# Altium PCB PCB1.PcbDoc (part 2 of 2)
Units mil, origin at the board's own origin, x right, y up, seen from the top; angles counter-clockwise.
Board outline 2700 x 1000 mil, 4 copper layers (L1, L2, L3, L4), stack 61.583 mil thick; 64 components, 73 nets, 299 pads, 54 vias.
Unrouted connection lines stored in the file: 173.
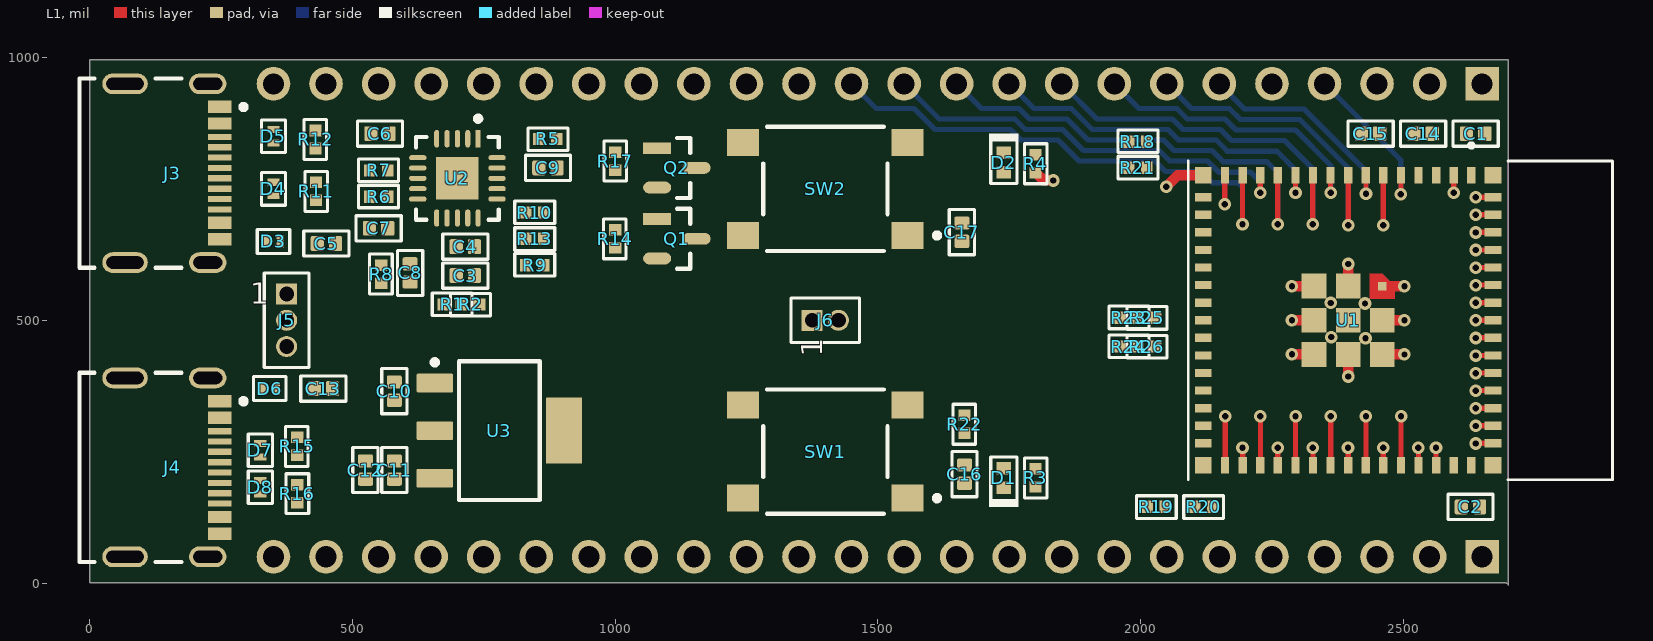
[diagram p0: L1 view]

## Part data (continued)
U3: "IC REG LIN 3.3V 1.5A SOT-223-4", Case/Package=SOT-223, Dropout Voltage=340mV, Input Bias Current=1mA, LCSC Part Number=C181262, Manufacturer="Texas Instruments", Manufacturer Lifecycle Status=ACTIVE, Max Operating Temperature=125°C, Max Output current=1.5A, Max Output Voltage=3.3V, Max Supply Voltage=20V, Min Current Limit=1.6A, Min Input Voltage=2.1V, Min Operating Temperature=-40°C, Supplier Part Number=296-24897-1-ND, Accuracy=3%, Category="LDO Voltage Regulators", ComponentLink1Description=https://datasheet.octopart.com:443/TL1963A-33DCYR-Texas-Instruments-datasheet-36835243.pdf?src-supplier=Texas+Instruments, ComponentLink1URL=https://datasheet.octopart.com:443/TL1963A-33DCYR-Texas-Instruments-datasheet-36835243.pdf?src-supplier=Texas+Instruments, ComponentLink2Description=https://octopart.com:443/opatz8j6/c1?t=3JsRIWqSL6w1YMJXUK4XflAjsV25ZZ_EetkhRYSAm2EBbnI7xXtyeG2xBdi87VpruzSQslnPG3MlCeq04Zf6_Wn-gbt73EcFwwS4SfZRo1SYsoWdJbtdm2yz9kLnOQiP5JpaTudvqM-9h63LWMv9fbu-og1U5PIleNPWEf7-bIKhh7h75kq7odK3UdIZw25Kv9-AILfUWP6PQjSZg4OQIrevZq1IFwdRPfSsN3Yxj7nPY41BQPnmV5rw9N0yaKfQo33QNfAFF_mFd2Zevg4OY0rB-bDb5_TwGj-Ur9LA0wBxWL8nhy2C-wQ2Sm4Cmp_5hpFAOTw7MI9oJy4UgUW1uRs8koqvsNYcHWrtBkSknF1nQXive0-rPctF-STb1cB_CFh3Xas&src-supplier=Texas+Instruments, ComponentLink2URL=https://octopart.com:443/opatz8j6/c1?t=3JsRIWqSL6w1YMJXUK4XflAjsV25ZZ_EetkhRYSAm2EBbnI7xXtyeG2xBdi87VpruzSQslnPG3MlCeq04Zf6_Wn-gbt73EcFwwS4SfZRo1SYsoWdJbtdm2yz9kLnOQiP5JpaTudvqM-9h63LWMv9fbu-og1U5PIleNPWEf7-bIKhh7h75kq7odK3UdIZw25Kv9-AILfUWP6PQjSZg4OQIrevZq1IFwdRPfSsN3Yxj7nPY41BQPnmV5rw9N0yaKfQo33QNfAFF_mFd2Zevg4OY0rB-bDb5_TwGj-Ur9LA0wBxWL8nhy2C-wQ2Sm4Cmp_5hpFAOTw7MI9oJy4UgUW1uRs8koqvsNYcHWrtBkSknF1nQXive0-rPctF-STb1cB_CFh3Xas&src-supplier=Texas+Instruments, ComponentLink3Description=https://datasheet.octopart.com:443/TL1963A-33DCYR-Texas-Instruments-datasheet-10255270.pdf?src-supplier=Texas+Instruments, ComponentLink3URL=https://datasheet.octopart.com:443/TL1963A-33DCYR-Texas-Instruments-datasheet-10255270.pdf?src-supplier=Texas+Instruments, ComponentLink4Description=https://sigma.octopart.com:443/49253063/technical_drawing/Texas-Instruments-TL1963A-33DCYR.pdf?src-supplier=Texas+Instruments, ComponentLink4URL=https://sigma.octopart.com:443/49253063/technical_drawing/Texas-Instruments-TL1963A-33DCYR.pdf?src-supplier=Texas+Instruments, ComponentLink5Description=https://datasheet.octopart.com:443/TL1963A-33DCYR-Texas-Instruments-datasheet-159117591.pdf?src-supplier=Augswan, ComponentLink5URL=https://datasheet.octopart.com:443/TL1963A-33DCYR-Texas-Instruments-datasheet-159117591.pdf?src-supplier=Augswan, ComponentLink6Description=https://datasheet.octopart.com:443/TL1963A-33DCYR-Texas-Instruments-datasheet-21820479.pdf?src-supplier=Newark, ComponentLink6URL=https://datasheet.octopart.com:443/TL1963A-33DCYR-Texas-Instruments-datasheet-21820479.pdf?src-supplier=Newark, ComponentLink7Description=https://datasheet.octopart.com:443/TL1963A-33DCYR-Texas-Instruments-datasheet-16079880.pdf?src-supplier=Farnell, ComponentLink7URL=https://datasheet.octopart.com:443/TL1963A-33DCYR-Texas-Instruments-datasheet-16079880.pdf?src-supplier=Farnell, ComponentLink8Description=https://datasheet.octopart.com:443/TL1963A-33DCYR-Texas-Instruments-datasheet-14171511.pdf?src-supplier=iiiC, ComponentLink8URL=https://datasheet.octopart.com:443/TL1963A-33DCYR-Texas-Instruments-datasheet-14171511.pdf?src-supplier=iiiC, ComponentLink9Description=http://sigma.octopart.com:80/reach_statement/Texas-Instruments-company-64.pdf?src-supplier=Compliance+Statements, ComponentLink9URL=http://sigma.octopart.com:80/reach_statement/Texas-Instruments-company-64.pdf?src-supplier=Compliance+Statements, ComponentLink10Description=http://sigma.octopart.com:80/conflict_mineral_statement/Texas-Instruments-company-63.pdf?src-supplier=Compliance+Statements, ComponentLink10URL=http://sigma.octopart.com:80/conflict_mineral_statement/Texas-Instruments-company-63.pdf?src-supplier=Compliance+Statements, Contact Plating=Tin, Height=1.8mm, Lead Free="Lead Free", Length=6.5mm, Lifecycle Status=Production, Manufacturer Part Number=TL1963A-33DCYR, Min Output Voltage=3.3V, Nominal Output Voltage=3.3V, Number of Outputs=1, Number of Regulators=1, Output Current=1.5A, Output Type=Fixed, Output Voltage=3.3V, Pins=4, Polarity=Positive, Pricing="1=2.76, 10=2.06, 25=1.8848, 100=1.6922, 250=1.60032, 500=1.54492, 1000=1.49932 (USD)", Quiescent Current=1mA, Radiation Hardening=No, REACH SVHC=No, RoHS=Compliant, Schedule B="8542390000, 8542390000|8542390000|8542390000|8542390000|8542390000", Stock=5348, Supplier=DigiKey, Thickness=1.6mm, Width=3.5mm

## Via types
v1: diameter 24, hole 12, L1 to L4, 54 vias

## Nets (pads, with @x,y where several pads share a name; then routed paths per layer and width w, separated by ;. In a path a pad name is that pad's centre, name@x,y a point inside that pad or via, vN(x,y) a via of type N, cw(c..) or ccw(c..) an arc to the next point about the centre after c; other vN are vias at no path point)
+3V3: C1.2 C2.2 C14.2 C15.2 J1.2 J2.1 J6.2 R2.1 R3.2 R4.2 R5.1 R22.2 U1.3 | length 40.1
  L1 w20: R4.2 1800.79,780.75 1815.54,766 v1(1834,766)
+3V3_FTDI: C7.2 C9.2 R5.2 R8.1 U2.10 U2.20
+3V3_REG: C11.2 C12.2 J6.1 U3.3
+5V: C6.2 C10.2 J1.22 J5.2 R1.1 U3.1
+5V_VBUS1: C5.2 D3.2 J3.A4B9 J3.B4A9 J5.1 R10.2
+5V_VBUS2: C13.2 D6.2 J4.A4B9 J4.B4A9 J5.3
+VCC_FTDI: C3.2 C4.2 R1.2 R2.2 U2.12
BTN_GPIO0: C17.2 Q2.3 R21.1 SW2.1 SW2.2
CHIP_PU: C16.2 J2.3 Q1.3 R22.1 SW1.1 SW1.2 U1.45
CON1_USB_N: D4.2 J3.A7 J3.B7 R6.1
CON1_USB_P: D5.2 J3.A6 J3.B6 R7.1
CON2_USB_N: D7.2 J4.A7 J4.B7 R23.1
CON2_USB_P: D8.2 J4.A6 J4.B6 R24.1
CON_ESP_USB_N: J2.21 R25.1
CON_ESP_USB_P: J2.20 R26.1
CON_GPIO0: J1.3 R18.1
DTR_FTDI: Q2.2 R14.2 U2.18
ESP_USB_N: R23.2 R25.2 U1.23
ESP_USB_P: R24.2 R26.2 U1.24
FTDI_USB_N: R6.2 U2.9
FTDI_USB_P: R7.2 U2.8
GND: C1.1 C2.1 C3.1 C4.1 C5.1 C6.1 C7.1 C8.1 C9.1 C10.1 C11.1 C12.1 C13.1 C14.1 C15.1 C16.1 C17.1 D1.1 D3.1 D4.1 D5.1 D6.1 D7.1 D8.1 J1.1 J1.23 J2.2 J2.24 J3.A1B12 J3.B1A12 J3.S1 J3.S2 J3.S3 J3.S4 J4.A1B12 J4.B1A12 J4.S1 J4.S2 J4.S3 J4.S4 R9.2 R11.1 R12.1 R13.1 R15.1 R16.1 SW1.3 SW1.4 SW2.3 SW2.4 U1.1 U1.2 U1.42 U1.43 U1.46 U1.47 U1.48 U1.49 U1.50 U1.51 U1.52 U1.53 U1.54 U1.55 U1.56 U1.57 U1.58 U1.59 U1.60 U1.61 U1.62 U1.63 U1.64 U1.65 U1.66 U1.67 U1.68 U1.69 U1.70 U1.71 U1.72 U1.73 U2.3 U2.13 U2.21 U3.2 U3.4 | length 1001.3
  L1 w10: U1.42 v1@2528.9,256.94 ; U1.43 v1@2562.36,256.94 ; v1@2595.83,743.06 U1.2 ; v1@2638.1,265.75 U1.46 ; v1@2638.1,299.21 U1.47 ; v1@2638.1,332.68 U1.48 ; v1@2638.1,366.14 U1.49 ; v1@2638.1,399.61 U1.50 ; v1@2638.1,433.07 U1.51 ; v1@2638.1,466.54 U1.52 ; v1@2638.1,500 U1.53 ; v1@2638.1,533.46 U1.54 ; v1@2638.1,566.93 U1.55 ; v1@2638.1,600.39 U1.56 ; v1@2638.1,633.86 U1.57 ; v1@2638.1,667.32 U1.58 ; v1@2638.1,700.79 U1.59 ; v1@2638.1,734.25 U1.60
  L1 w20: v1(2049,754) 2070.59,775.59 U1.63 ; v1(2288,565) v1(2288,565) U1.71 ; v1@2288.04,435.04 U1.73 ; v1(2288,500.04) U1.72 ; v1(2395,392.96) U1.70 ; U1.69 v1@2395.04,607 ; U1.68 v1@2502.04,435.04 ; U1.67 v1@2502.04,500 ; U1.66 v1@2502.04,564.96
  other v1: 2528.65,257.19 2562.11,257.19 2637.85,265.5 2637.85,298.96 2637.85,332.43 2637.85,365.89 2637.85,399.36 2637.85,432.82 2288,435.08 2502.08,435 2428,466 2637.85,466.29 2363,468 2502.08,499.96 2637.85,499.75 2427,532 2362,533 2637.85,533.22 2502.08,564.92 2637.85,566.68 2637.85,600.15 2395.08,607.04 2637.85,633.61 2637.85,667.07 2637.85,700.54 2637.85,734 2596.07,742.81
GPIO0: R18.2 R21.2 U1.4
GPIO1: J1.4 U1.5 | length 305.8
  L1 w10: v1(2495,740) 2495.43,740.43 U1.5
  L4 w10: J1.4 2495,805 v1(2495,740)
GPIO2: D2.1 J1.5 U1.6 | length 94.6
  L1 w10: v1@2461.97,681.04 U1.6
  other v1: 2461.95,681.02
GPIO3: J1.6 U1.7 | length 424
  L1 w10: v1(2429,741) 2428.75,741.25 2428.75,773.78 U1.7@2429,774.02
  L4 w10: J1.6 2198,902 2311,902 2429,784 v1(2429,741)
GPIO4: J1.7 U1.8 | length 614.7
  L1 w10: v1(2395,681) U1.8
  L4 w10: J1.7 2097,903 2168.72,903 2189.86,881.86 2302.86,881.86 2395.04,789.68 v1(2395,681) v1(2395,681)
GPIO5: J1.8 U1.9 | length 560.5
  L1 w10: v1@2361.57,743.06 U1.9
  L4 w10: J1.8 1997,903 2068.72,903 2088.72,883 2160.43,883 2181.57,861.86 2294.57,861.86 2361.82,794.61 v1(2361.82,742.81)
GPIO6: J1.9 U1.10 | length 744.8
  L1 w10: v1(2327.82,682.81) U1.10@2327.84,777.39
  L4 w10: J1.9 1917,883 2060.43,883 2080.43,863 2152.15,863 2173.29,841.86 2274.14,841.86 2327.82,788.18 v1(2327.82,682.81)
GPIO7: J1.10 U1.11 | length 688.6
  L1 w10: v1@2294.65,743.06 U1.11
  L4 w10: J1.10 1797,903 1868,903 1908,863 2052.15,863 2072.15,843 2143.86,843 2165.01,821.86 2259.14,821.86 2294.89,786.11 v1(2294.89,742.81)
GPIO8: J1.11 U1.12 | length 873.7
  L1 w10: v1(2260.89,682.81) U1.12@2260.91,777.39
  L4 w10: J1.11 1697,903 1768.72,903 1788.72,883 1859.72,883 1899.72,843 2043.86,843 2063.86,823 2135.58,823 2156.72,801.86 2240.18,801.86 2260.89,781.14 v1(2260.89,682.81)
GPIO9: J1.12 U1.13 | length 808.3
  L1 w10: v1@2227.72,743.06 U1.13
  L4 w10: J1.12 1617,883 1760.43,883 1780.43,863 1851.43,863 1891.43,823 2035.58,823 2055.58,803 2127.29,803 2148.44,781.86 2209.28,781.86 2228,763.14 2228,742.85 v1(2227.96,742.81)
GPIO10: J1.13 U1.14 | length 990.4
  L1 w10: v1(2193.96,682.81) U1.14@2193.98,777.39
  L4 w10: J1.13 1497,903 1568.72,903 1608.72,863 1752.15,863 1772.15,843 1843.15,843 1883.15,803 2027.29,803 2047.29,783 2115,783 2136.14,761.86 2185.29,761.86 2193.96,753.18 v1(2193.96,682.81)
GPIO11: J1.14 U1.15 | length 54.9
  L1 w10: v1(2160,721) 2160.39,721.39 2160.39,775.2 U1.15
GPIO12: J1.15 U1.16
GPIO13: J1.16 U1.17
GPIO14: J1.17 U1.18
GPIO15: J1.18 U1.19
GPIO16: J1.19 U1.20
GPIO17: J1.20 U1.21
GPIO18: J1.21 U1.22
GPIO21: J2.19 U1.25
GPIO26: J2.18 U1.26
GPIO33: J2.17 U1.28
GPIO34: J2.16 U1.29
GPIO35: J2.15 U1.31 | length 94.6
  L1 w10: U1.31@2161.06,222.61 v1(2161.07,317.19)
GPIO36: J2.14 U1.32 | length 32.5
  L1 w10: U1.32 v1@2194.25,256.94
  other v1: 2194,257.19
GPIO37: J2.13 U1.33 | length 94.6
  L1 w10: U1.33@2227.98,222.61 v1(2228,317.19)
GPIO38: J2.12 U1.34 | length 32.5
  L1 w10: U1.34 v1@2261.18,256.94
  other v1: 2260.93,257.19
GPIO39: J2.11 U1.35 | length 94.6
  L1 w10: U1.35@2294.91,222.61 v1(2294.93,317.19)
GPIO40: J2.10 U1.36 | length 32.5
  L1 w10: U1.36 v1@2328.11,256.94
  other v1: 2327.86,257.19
GPIO41: J2.9 U1.37 | length 94.6
  L1 w10: U1.37@2361.84,222.61 v1@2361.84,317.17
  other v1: 2361.86,317.19
GPIO42: J2.8 U1.38 | length 32.5
  L1 w10: U1.38 v1@2395.04,256.94
  other v1: 2394.79,257.19
GPIO45: J2.5 U1.41 | length 94.6
  L1 w10: U1.41@2495.7,222.61 v1(2495.72,317.19)
GPIO46: J2.4 U1.44
GPIO47: J2.23 U1.27
GPIO48: J2.22 U1.30
NetC8_2: C8.2 R8.2 U2.11
NetD1_2: D1.2 R3.1
NetD2_2: D2.2 R4.1
NetJ3_A5: J3.A5 R12.2
NetJ3_B5: J3.B5 R11.2
NetJ4_A5: J4.A5 R16.2
NetJ4_B5: J4.B5 R15.2
NetQ1_1: Q1.1 R14.1
NetQ2_1: Q2.1 R17.1
NetR9_1: R9.1 U2.15
RTS_FTDI: Q1.2 R17.2 U2.19
RXD_FTDI: R19.2 U2.1
TXD_FTDI: R20.2 U2.17
U0RXD: J2.6 R20.1 U1.40 | length 32.5
  L1 w10: U1.40 v1@2461.97,256.94
  other v1: 2461.72,257.19
U0TXD: J2.7 R19.1 U1.39 | length 94.6
  L1 w10: U1.39@2428.77,222.61 v1(2428.79,317.19)
VBUS_SENSE: R10.1 R13.2 U2.16
pads on no net: J1.24 J3.A8 J3.B8 J4.A8 J4.B8 U2.2 U2.4 U2.5 U2.6 U2.7 U2.14

## Polygon pours and split planes (outlines as drawn)
GND on L3 (split plane): 2679.9,20.38 20.1,20.38 20.1,975.9 2679.9,975.9

## Text inside footprints (layer, text, board x,y; h text height)
J1: Bottom Overlay "1" at 2631,870 h40 r270
J2: Bottom Overlay "1" at 2631,-30 h40 r270
J5: Top Overlay "1" at 306,531 h40
J6: Top Overlay "1" at 1394,431 h40 r90